# EAGLE board Jack Mount (EAGLE 9.6.2)
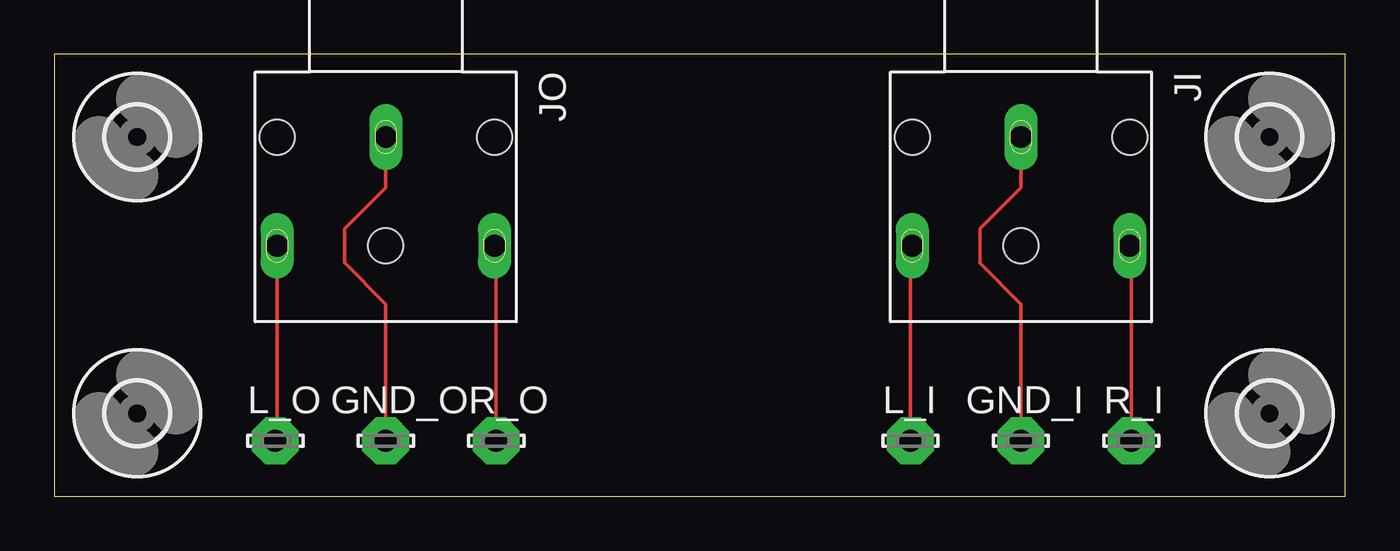
[diagram p0: board, top side]

Size 59.36 x 20.31 mm. Coordinates in mm from the lower left corner, seen from the top.
Outline: 0,0 59.36,0 59.36,20.31 0,20.31 0,0
Copper layers (1*16): Top 0.035mm / dielectric 1.5mm / Bottom 0.035mm
Design rules "default": minimum track width 6mil, minimum drill 0.35mm, track to track 6mil, track to pad 6mil, pad to pad 6mil, via to via 6mil, smd to smd 6mil, copper to edge 40mil, drill to drill 6mil, minimum pad ring 10mil, minimum via ring 8mil, stop-mask expansion 4mil, vias tented up to drill 0mil, thermal gap 10mil

## Footprints (pad centres in the part's own frame; a part is rotated, then mirrored left to right if it is on the bottom)
LSP10 = drill 1.016 pad 2.159 octagon: MP 0,0
2,8 = hole 2.8: 0,0
CUI_SJ1-3553NG = drill 1 pad 1.35 long: 1 0,0; 2 5,-5; 3 5,5 | hole 1.6: 0,5; 0,-5; 5,0

## Placement (x,y rotation side)
GND_I  LSP10  [LSP10]  44.45,2.54 0 top
GND_O  LSP10  [LSP10]  15.24,2.54 0 top
H1  MOUNT-HOLE2.8  [2,8]  3.81,16.51 0 top
H2  MOUNT-HOLE2.8  [2,8]  55.88,16.51 0 top
H3  MOUNT-HOLE2.8  [2,8]  3.81,3.81 0 top
H4  MOUNT-HOLE2.8  [2,8]  55.88,3.81 0 top
JI  SJ1-3553NG  [CUI_SJ1-3553NG]  44.45,16.51 270 top
JO  SJ1-3553NG  [CUI_SJ1-3553NG]  15.24,16.51 270 top
L_I  LSP10  [LSP10]  39.37,2.54 0 top
L_O  LSP10  [LSP10]  10.16,2.54 0 top
R_I  LSP10  [LSP10]  49.53,2.54 0 top
R_O  LSP10  [LSP10]  20.32,2.54 0 top

## Library data of the parts
GND_I GND_O L_I L_O R_I R_O = solpad
H1-H4 = holes
JI JO = SJ1-3553NG; AVAILABILITY: In Stock; CUI_PURCHASE_URL: https://www.cuidevices.com/product/interconnect/connectors/audio-connectors/jacks/sj1-355xng-series?utm_source=snapeda.com&utm_medium=referral&utm_campaign=snapedaBOM; DESCRIPTION: 3.5 mm, Stereo, Right Angle, Through Hole, Isolated Ground, Kinked Pins, Audio Jack Connector; MF: CUI Devices; MP: SJ1-3553NG; PACKAGE: None; PRICE: None; PURCHASE-URL: https://pricing.snapeda.com/search/part/SJ1-3553NG/?ref=eda

## Nets
N$1: GND_I.MP JI.1
N$2: JI.3 R_I.MP
N$3: JI.2 L_I.MP
N$4: GND_O.MP JO.1
N$5: JO.3 R_O.MP
N$6: JO.2 L_O.MP

## Tracks (layer width: path | path; a pad name or v marks a point on that pad's centre or on a via)
N$1
  Top 0.152: GND_I.MP 44.45,8.83 42.56,10.73 42.56,12.29 44.45,14.19 JI.1
N$2
  Top 0.152: JI.3 49.53,11.43 R_I.MP
N$3
  Top 0.152: L_I.MP 39.37,11.43 JI.2
N$4
  Top 0.152: GND_O.MP 15.24,8.83 13.35,10.73 13.35,12.29 15.24,14.19 JO.1
N$5
  Top 0.152: JO.3 20.32,11.43 R_O.MP
N$6
  Top 0.152: JO.2 10.24,2.62 L_O.MP